# Altium PCB RFOUT DaughterBoard.PcbDoc
Units mil, origin at the board's own origin, x right, y up, seen from the top; angles counter-clockwise.
Board outline 6000 x 4000 mil, 2 copper layers (Top Layer, Bottom Layer); 25 components, 20 nets, 68 pads, 0 vias.
Unrouted connection lines stored in the file: 47.
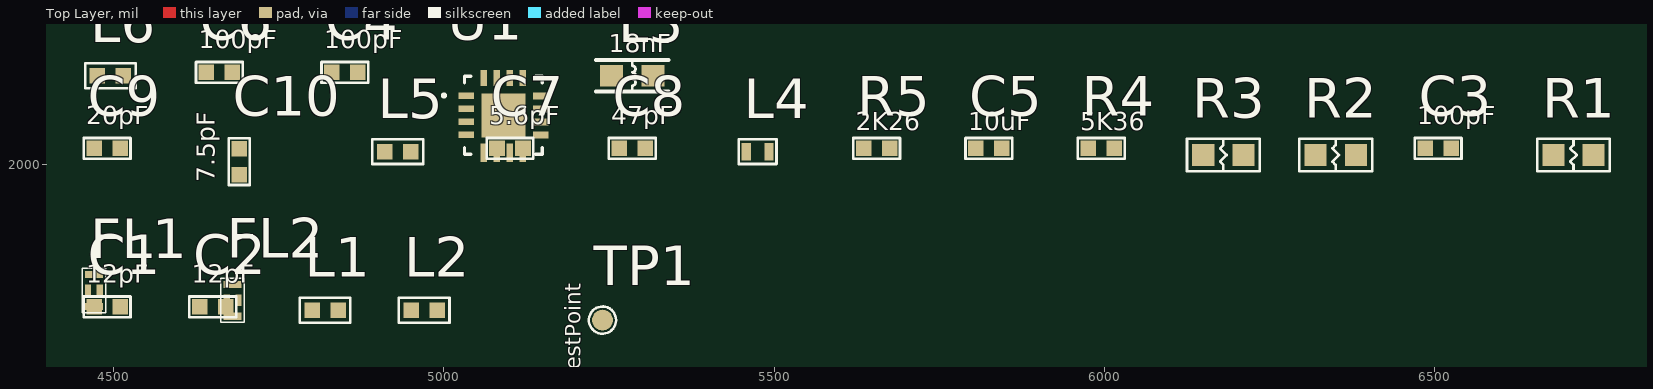
[diagram p0: Top Layer view]
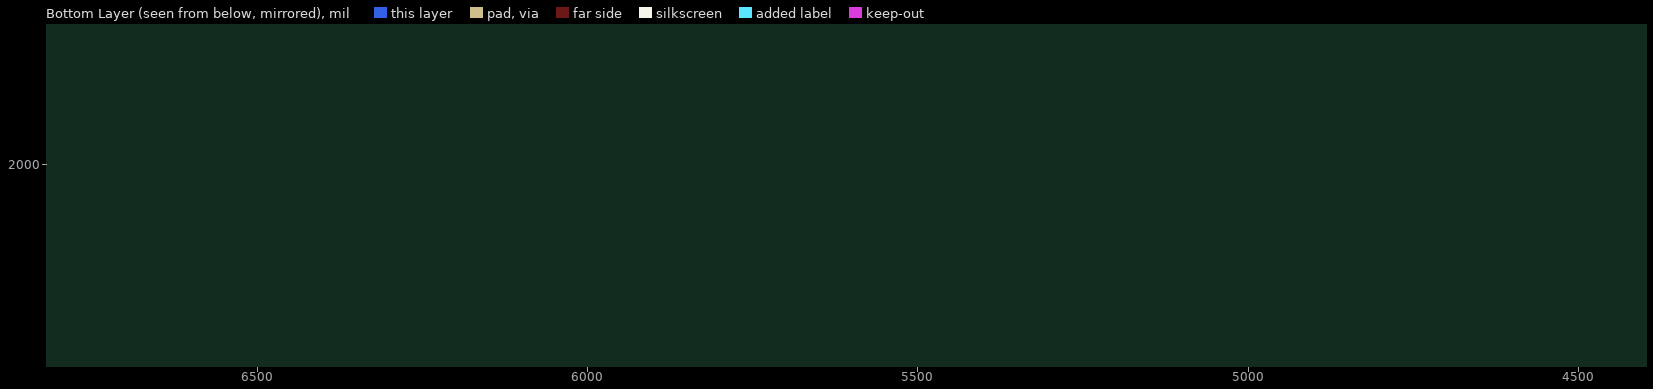
[diagram p1: Bottom Layer view, seen from below]

## Layer stack, top to bottom
Top Solder: solder mask 0.4, Solder Resist, Dk 3.5
Top Layer: signal copper 1.4
Dielectric 1: dielectric 12.6, FR-4, Dk 4.8
Bottom Layer: signal copper 1.4
Bottom Solder: solder mask 0.4, Solder Resist, Dk 3.5

## Board outline
1000,1000 7000,1000 7000,5000 1000,5000

## Design rules (kind name [scope] priority, off if disabled: settings)
Clearance [All] p1: gap=10 ignorepadtopadclearanceinfootprint=FALSE
PolygonConnect [All] p1: connectstyle=Relief reliefconductorwidth=10 reliefentries=4 polygonreliefangle="90 Angle" airgapwidth=10
RoutingVias [All] p1: holewidth=28 width=50 viastyle="Through Hole" minholewidth=28 minwidth=50 maxholewidth=28 maxwidth=50
SolderMaskExpansion [All] p1: expansion=0 istentingtop=FALSE
SupplyNets "Schematic Supply Nets_2" [InNet('GRG5610_VCC2')] p1: voltage=0.000
SupplyNets "Schematic Supply Nets_1" [InNet('GRG5610_VCC1')] p2: voltage=0.000
SupplyNets "Schematic Supply Nets" [InNet('GND')] p3: voltage=0.000
Width [All] p1: maxlimit=10 minlimit=10 preferedwidth=10
30 further rules are at their usual default settings.

## Classes and differential pairs
net class RF: GRF5610_RFIN NetC1_1 NetC2_1 NetC7_2 NetC8_1 NetC8_2 NetC9_1 NetFL1_1 NetFL2_3
component class U_Amplifier: C3 C4 C5 C6 C7 C8 C9 C10 L3 L4 L5 L6 R1 R2 R3 R4 R5 TP1 U1
component class "RFOUT DaughterBoard": C1 C2 FL1 FL2 L1 L2

## Components (designator, comment, footprint, x,y, rotation, side; value= is the part's Value field where it differs from the comment)
C1 "12pF" "CAP Ceramic SMD 0402" 4490,1785 r0 top
C2 "12pF" "CAP Ceramic SMD 0402" 4650,1785 r0 top
C3 "100pF" "CAP Ceramic SMD 0402" 6505,2025 r0 top
C4 "100pF" "CAP Ceramic SMD 0402" 4850,2140 r0 top
C5 "10uF" "CAP Ceramic SMD 0402" 5825,2025 r0 top
C6 "100pF" "CAP Ceramic SMD 0402" 4660,2140 r0 top
C7 "5.6pF" "CAP Ceramic SMD 0402" 5100,2025 r0 top
C8 "47pF" "CAP Ceramic SMD 0402" 5285,2025 r0 top
C9 "20pF" "CAP Ceramic SMD 0402" 4490,2025 r0 top
C10 "7.5pF" "CAP Ceramic SMD 0402" 4690,2005 r90 top
FL1 "DEA160960LT-5059A1" DEA160960LT-5059A1 4470,1810 r90 top
FL2 "DEA160960LT-5059A1" DEA160960LT-5059A1 4680,1795 r90 top
L1 "11nF" "IND SMD 0402" 4820,1780 r0 top
L2 "11nF" "IND SMD 0402" 4970,1780 r0 top
L3 "18nF" "IND SMD 0603" 5285,2135 r0 top
L4 "18nF" "IND SMD 0402HP" 5475,2020 r0 top
L5 "2.5nF" "IND SMD 0402" 4930,2020 r0 top
L6 "6.2nF" "IND SMD 0402" 4495,2135 r0 top
R1 "0R" "RES SMD 0603" 6710,2015 r0 top
R2 "0R" "RES SMD 0603" 6350,2015 r0 top
R3 "0R" "RES SMD 0603" 6180,2015 r0 top
R4 "5K36" "CAP Ceramic SMD 0402" 5995,2025 r0 top
R5 "2K26" "CAP Ceramic SMD 0402" 5655,2025 r0 top
TP1 "TestPoint" "TestPoint Surface 0.8mm" 5240,1765 r90 top
U1 "GRF5610" QFN50P300X300X80-17N 5090,2075 r0 top

## Footprints (in the part's own frame and the unit in brackets; to place one, negate y for a bottom-side part, rotate by r counter-clockwise, add the part's x,y. Pads: shape width x height; smd on the part's side, far side on the other; paste and mask are expansions set on the pad)
"CAP Ceramic SMD 0402" [mm]
  rect 0.6x0.6 smd mask+0.05: 1(-0.5,0) 2(0.5,0)
  silkscreen extent -0.9,-0.4 0.9,0.4, body extent -0.51,-0.25 0.51,0.25, height 0.51
DEA160960LT-5059A1 [mm]
  rect 0.275x0.7 smd paste+0 mask+0: 1(-0.613,0) 3(0.613,0)
  rect 0.45x0.245 smd paste+0 mask+0: 2(0,0.228) 4(0,-0.228)
  silkscreen extent -0.85,-0.45 0.85,0.45, body extent -0.85,-0.45 0.85,0.45, height 0.7
"IND SMD 0402" [mm]
  rect 0.6x0.6 smd mask+0.05: 1(-0.5,0) 2(0.5,0)
  silkscreen extent -0.97,-0.48 0.97,0.48, body extent -0.52,-0.25 0.47,0.25, height 0.34
"IND SMD 0402HP" [mm]
  rect 0.36x0.66 smd: 1(-0.435,0) 2(0.435,0)
  silkscreen extent -0.73,-0.48 0.72,0.48, body extent -0.55,-0.36 0.55,0.36, height 0.62
"IND SMD 0603" [mm]
  rect 0.89x0.82 smd: 1(-0.8,0) 2(0.8,0)
  silkscreen extent -1.4,-0.6 1.4,0.6, body extent -0.8,-0.4 0.8,0.4, height 0.95
QFN50P300X300X80-17N [mm]
  rect 0.6x0.25 smd: 1(-1.435,0.75) 2(-1.435,0.25) 3(-1.435,-0.25) 4(-1.435,-0.75)
  rect 0.25x0.7 smd: 5(-0.75,-1.435) 6(-0.25,-1.435) 7(0.25,-1.435) 8(0.75,-1.435)
  rect 0.6x0.27 smd: 9(1.435,-0.75) 10(1.435,-0.25) 11(1.435,0.25) 12(1.435,0.75)
  rect 0.25x0.6 smd: 13(0.75,1.435) 14(0.25,1.435) 15(-0.25,1.435) 16(-0.75,1.435)
  rect 1.7x1.7 smd: 17(0,0)
  silkscreen extent -2.35,-1.5 1.5,1.5, body extent -1.5,-1.5 1.5,1.5, height 1.01
"RES SMD 0603" [mm]
  rect 0.85x0.85 smd: 1(-0.775,0) 2(0.775,0)
  silkscreen extent -1.4,-0.63 1.4,0.63, body extent -0.8,-0.4 0.8,0.4, height 0.44
"TestPoint Surface 0.8mm" [mm]
  round 0.8 smd mask+0.05: 1(0,0)
  silkscreen extent -0.52,-0.52 0.52,0.52

## Part data
C1 C2: library part "CAP 0402 12pF 50V", "CAP CER 12pF 50V C0G 0402", Manufacturer=muRata, Manufacturer Part Number=GJM1555C1H120FB01D, Supplier Part Number=C161304, Tolerance=2%, Voltage Rating=50V, Capacitance=12pF, Supplier=LCSC
C3 C4 C6: library part "CAP 0402 100pF 50V", "CAP CER 100pF 50V C0G 0402", Manufacturer=muRata, Manufacturer Part Number=GRM1555C1H101JA01D, Supplier Part Number=C77177, Tolerance=5%, Voltage Rating=50V, Capacitance=100pF, Supplier=LCSC
C5: library part "CAP 0402 10uF 6.3V", "CAP CER 10uF 6.3V X6S", Manufacturer=muRata, Manufacturer Part Number=GRT155C80J106ME13D, Supplier Part Number=C20044558, Tolerance=20%, Voltage Rating=6.3V, Capacitance=10uF, Supplier=LCSC
C7: library part "CAP 0402 5.6pF 50V", "CAP CER 5.6pF 50V C0G 0402", Manufacturer=muRata, Manufacturer Part Number=GJM1555C1H5R6BB01D, Supplier Part Number=C161329, Voltage Rating=50V, Capacitance=5.6pF, Supplier=LCSC
C8: library part "CAP 0402 47pF 50V", "CAP CER 47pF 50V C0G 0402", Manufacturer=muRata, Manufacturer Part Number=GJM1555C1H470GB01D, Supplier Part Number=C3843411, Tolerance=2%, Voltage Rating=50V, Capacitance=47pF, Supplier=LCSC
C9: library part "CAP 0402 20pF 50V", "CAP CER 20pF 50V C0G 0402", Manufacturer=muRata, Manufacturer Part Number=GJM1555C1H200GB01D, Supplier Part Number=C882568, Tolerance=2%, Voltage Rating=6.3V, Capacitance=20pF, Supplier=LCSC
C10: library part "CAP 0402 7.5pF 50V", "CAP CER 7.5pF 50V C0G 0402", Manufacturer=muRata, Manufacturer Part Number=GJM1555C1H7R5BB01D, Supplier Part Number=C497526, Tolerance="0.1 pF", Voltage Rating=50V, Capacitance=7.5pF, Supplier=LCSC
FL1 FL2: "Multilayer Low Pass Filter For 698 - 960 MHz", Manufacturer=TDK, Supplier Part Number=C695578, Manufacturer Part Number=DEA160960LT-5059A1, Supplier=LCSC
L1 L2: library part "IND 0402 11nH", "FIXED IND 11nH 1.4A 83mΩ 0402", Manufacturer=muRata, Manufacturer Part Number=LQW15AN11NG8ZD, Supplier Part Number=C2044108, Supplier=LCSC
L3: library part "IND 0603 18nH", "FIXED IND 18nH 1.4A 75mΩ 0603", Manufacturer=muRata, Manufacturer Part Number=LQW18AN18NG8ZD, Supplier Part Number=C1329352, Supplier=LCSC
L4: library part "IND 0402 18nH", "900mA 18nH ±5% 120mΩ Wire-wound chip inductor 0402 Fixed Inductors RoHS", Manufacturer=Coilcraft, Manufacturer Part Number=0402HP-18NXJRW, Supplier Part Number=C39084920, Supplier=LCSC
L5: library part "IND 0402 2.5nH", "FIXED IND 2.5nH 2.1A 30mΩ 0402", Manufacturer=muRata, Manufacturer Part Number=LQW15AN2N5G80D, Supplier Part Number=C412267, Supplier=LCSC
L6: library part "IND 0402 6.2nH", "FIXED IND 6.2nH 700mA 90mΩ 0402", Manufacturer=muRata, Manufacturer Part Number=LQW15AN6N2C00D, Supplier Part Number=C113118, Supplier=LCSC
R1 R2 R3: library part "RES 0603 0R 1%", "100mW Thick Film Resistors 75V ±5% 0Ω 0603 Chip Resistor - Surface Mount ROHS", Manufacturer=YAGEO, Manufacturer Part Number=RC0603JR-070RL, Supplier Part Number=C95177, Supplier=LCSC
R4: library part "RES 0402 5K36 1%", "RES 5.36kΩ ±1% 100mW 0402", Manufacturer=PANASONIC, Manufacturer Part Number=ERJ2RKF5361X, Supplier Part Number=C3025674, Tolerance=1%, Resistance=5K36, Supplier=LCSC
R5: library part "RES 0402 2k26 0.1%", "RES 2.26kΩ ±0.1% 62.5mW 0402", Manufacturer=YAGEO, Manufacturer Part Number=RT0402BRD072K26L, Supplier Part Number=C852697, Tolerance=0.1%, Resistance=2K26, Supplier=LCSC
U1: "The GRF5610 is a high gain, two-stage InGaP HBT power amplifier designed to deliver excellent P1dB, ACLR and IM3 performance over the 860 to 928 MHz band. Its exceptional native linearity makes it an ideal choice for transmitter applications that typically do not employ digital predistortion correction schemes.", Manufacture="Guerrilla RF", Manufacture Part Number=GRF5610

## Nets (pads, with @x,y where several pads share a name; then routed paths per layer and width w, separated by ;. In a path a pad name is that pad's centre, name@x,y a point inside that pad or via, vN(x,y) a via of type N, cw(c..) or ccw(c..) an arc to the next point about the centre after c; other vN are vias at no path point)
GND: C1.2 C2.2 C3.2 C4.2 C5.2 C6.2 C9.2 C10.2 FL1.2 FL1.4 FL2.2 FL2.4 L6.2 U1.2 U1.5 U1.6 U1.7 U1.8 U1.11 U1.14 U1.17
GRF5610_RFIN: C7.1 FL1.3 L6.1
GRF5610_VSHDIN: R2.1
GRG5610_VCC1: C3.1 L3.1 R1.1
GRG5610_VCC2: C4.1 C5.1 L4.1 R1.2 R3.2
NetC1_1: C1.1 L1.2
NetC2_1: C2.1 L2.2
NetC6_1: C6.1 R5.2 U1.16
NetC7_2: C7.2 U1.3 U1.4
NetC8_1: C8.1 C10.1 L5.1
NetC8_2: C8.2 FL2.1
NetC9_1: C9.1 L4.2 L5.2 U1.9 U1.10
NetFL1_1: FL1.1 L1.1
NetFL2_3: FL2.3 L2.1
NetL3_2: L3.2 U1.13
NetR2_2: R2.2 TP1.1 U1.1
NetR3_1: R3.1 U1.12
NetR4_1: R4.1
NetR4_2: R4.2 U1.15
NetR5_1: R5.1